# Altium PCB 6613360201.PcbDoc
Units mm, origin at the board's own origin, x right, y up, seen from the top; angles counter-clockwise.
Board outline 92.71 x 45 mm, 2 copper layers (Top Layer, Bottom Layer), stack 1.575 mm thick; 2 components, 4 nets, 16 pads, 4 vias.
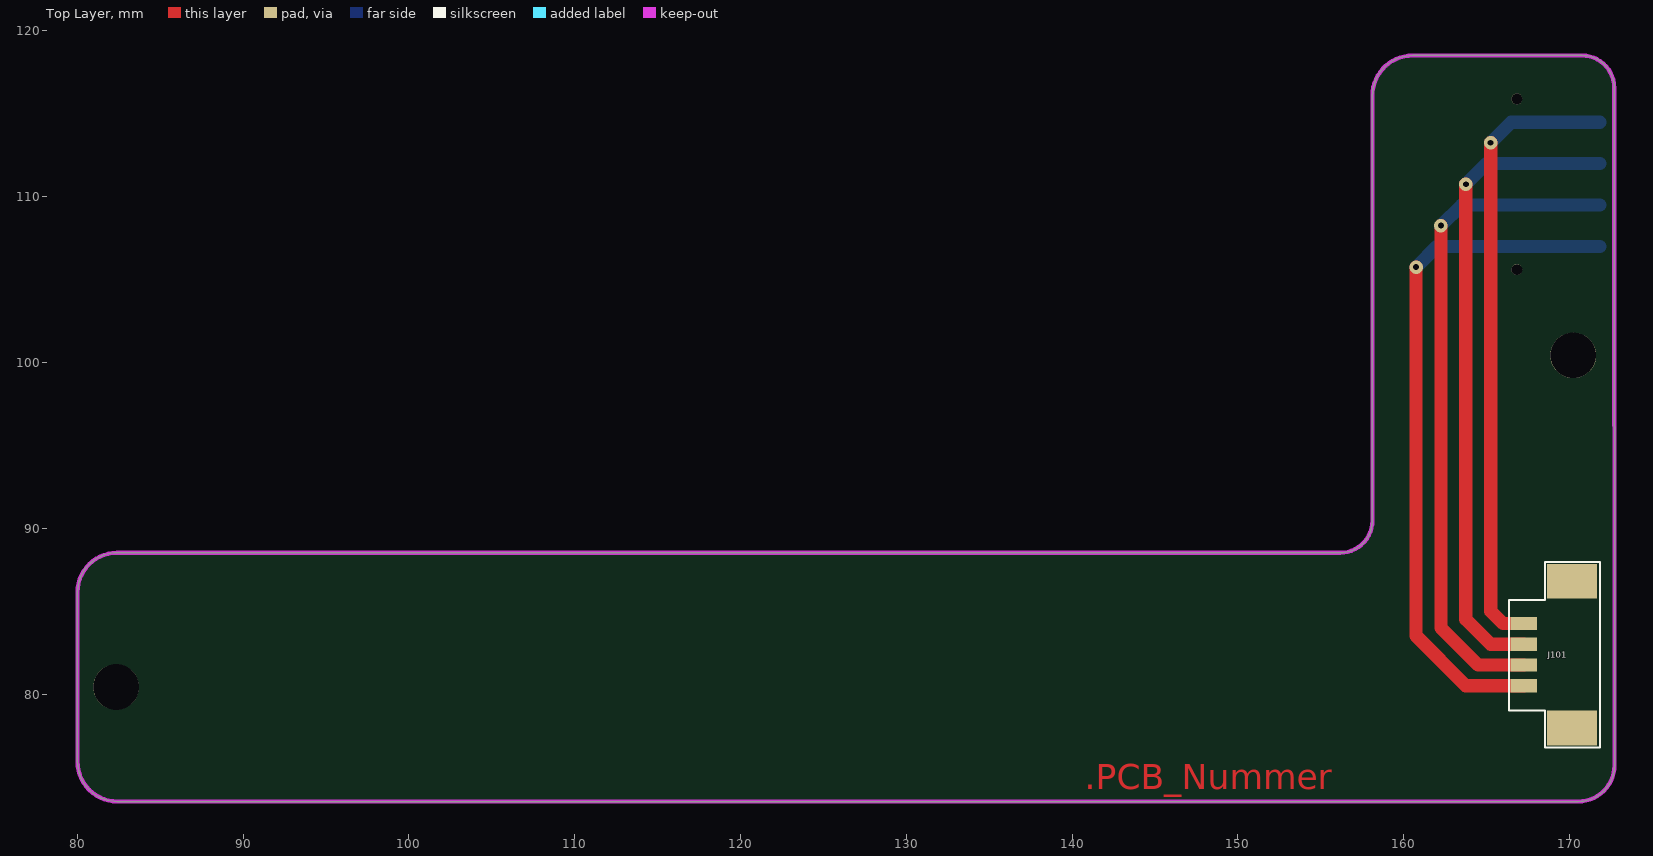
[diagram p0: Top Layer view]
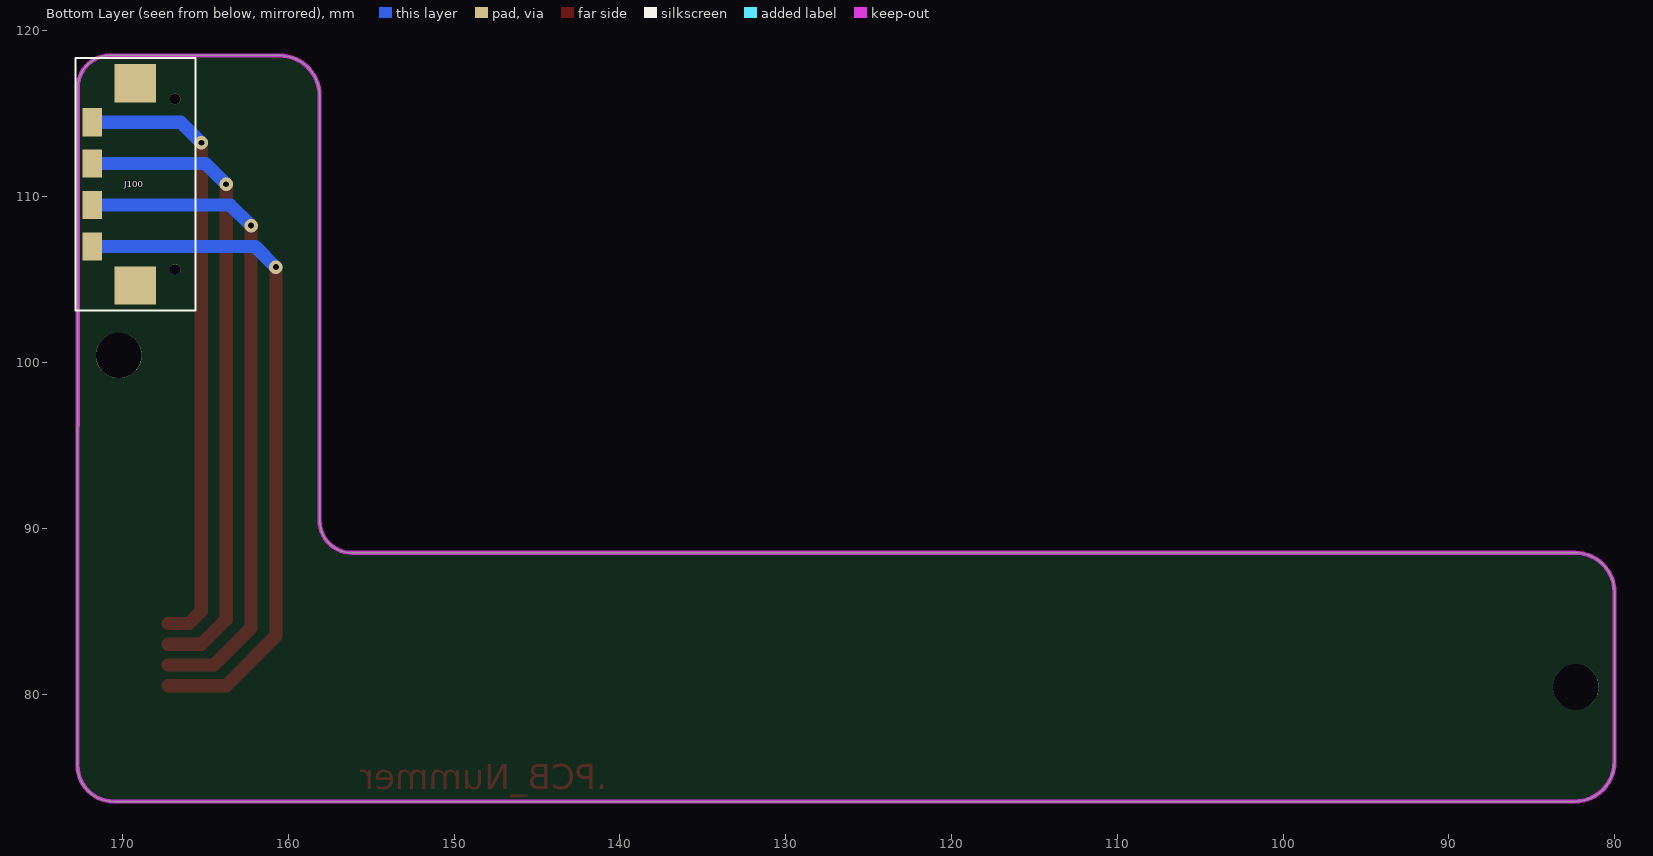
[diagram p1: Bottom Layer view, seen from below]

## Layer stack, top to bottom
Top Solder: solder mask 0.0127, Solder Resist, Dk 3.3
Top Layer: signal copper 0.035
Dielectric2: prepreg 1.5046, FR-4, Dk 4.3
Bottom Layer: signal copper 0.035
Bottom Solder: solder mask 0.0127, Solder Resist, Dk 3.3

## Board outline
80.01,75.927 80.01,86.138 cw(c82.391,86.138) 82.391,88.519 156.169,88.519 ccw(c156.169,90.465) 158.115,90.465 158.115,116.091 cw(c160.54,116.091) 160.54,118.516 170.759,118.516 cw(c170.759,116.573) 172.702,116.573 172.72,75.713 cw(c170.523,75.713) 170.523,73.516 82.421,73.516 cw(c82.421,75.927)

## Design rules (kind name [scope] priority, off if disabled: settings)
Clearance ClearancePad/Keepout [(IsPad) vs (OnLayer('Keep-Out Layer'))] p1: gap=0.5 ignorepadtopadclearanceinfootprint=FALSE except(0: Arc-Hole Track-Hole SMDPad-Hole THPad-Hole Via-Hole Fill-Hole Poly-Hole Region-Hole Text-Hole; 0.125: Arc-SMDPad Track-SMDPad)
Clearance ClearancePad/Pad [(IsPad) vs (IsPad)] p2: gap=0.203 ignorepadtopadclearanceinfootprint=FALSE except(0: Arc-Hole Track-Hole SMDPad-Hole THPad-Hole Via-Hole Fill-Hole Poly-Hole Region-Hole Text-Hole)
Clearance ClearancePoly/Keepout [(IsRegion) vs (OnLayer('Keep-Out Layer'))] p3: gap=0.508 ignorepadtopadclearanceinfootprint=FALSE except(0: Arc-Hole Track-Hole SMDPad-Hole THPad-Hole Via-Hole Fill-Hole Poly-Hole Region-Hole Text-Hole)
Clearance ClearancePoly/All [(IsRegion)] p4: gap=0.254 ignorepadtopadclearanceinfootprint=FALSE except(0: Arc-Hole Track-Hole SMDPad-Hole THPad-Hole Via-Hole Fill-Hole Poly-Hole Region-Hole Text-Hole)
Clearance "ClearancePad/Via same Net" [(IsPad) vs (IsVia)] p5: gap=0.127 ignorepadtopadclearanceinfootprint=FALSE except(0: Arc-Hole Track-Hole SMDPad-Hole THPad-Hole Via-Hole Fill-Hole Poly-Hole Region-Hole Text-Hole)
Clearance "ClearancePad/Via different Net" [(IsPad) vs (IsVia)] p6: gap=0.203 ignorepadtopadclearanceinfootprint=FALSE except(0: Arc-Hole Track-Hole SMDPad-Hole THPad-Hole Via-Hole Fill-Hole Poly-Hole Region-Hole Text-Hole)
Clearance ClearanceVia/Via [(IsVia) vs (IsVia)] p7: gap=0.203 ignorepadtopadclearanceinfootprint=FALSE except(0: Arc-Hole Track-Hole SMDPad-Hole THPad-Hole Via-Hole Fill-Hole Poly-Hole Region-Hole Text-Hole)
Clearance ClearanceTrack/Via [(IsTrack) vs (IsVia)] p8: gap=0.203 ignorepadtopadclearanceinfootprint=FALSE except(0: Arc-Hole Track-Hole SMDPad-Hole THPad-Hole Via-Hole Fill-Hole Poly-Hole Region-Hole Text-Hole)
Clearance ClearanceTrack/Pad [(IsTrack) vs (IsPad)] p9: gap=0.203 ignorepadtopadclearanceinfootprint=FALSE except(0: Arc-Hole Track-Hole SMDPad-Hole THPad-Hole Via-Hole Fill-Hole Poly-Hole Region-Hole Text-Hole)
Clearance ClearanceTrack/Track [(IsTrack) vs (IsTrack)] p10: gap=0.203 ignorepadtopadclearanceinfootprint=FALSE except(0: Arc-Hole Track-Hole SMDPad-Hole THPad-Hole Via-Hole Fill-Hole Poly-Hole Region-Hole Text-Hole)
ComponentClearance [All] p1: gap=0.127 collisioncheckmode=3 verticalgap=0.254 showdistances=FALSE
FabricationTestPointUsage TestPointUsage [All] p1: valid=0 allowmultiple=FALSE
FabricationTestpoint Testpoint [All] p1: side=3 testpointundercomponent=TRUE minsize=1.016 maxsize=2.54 preferedsize=1.524 minholesize=0 maxholesize=1.016 preferedholesize=0.813 testpointgrid=0.025 allowsidetop=TRUE allowsidebottom=TRUE usegrid=TRUE gridtolerance=0
HoleSize [All] p1: absolutevalues=TRUE maxlimit=254 minlimit=0.025 maxpercent=80.000 minpercent=20.000
PlaneConnect [All] p1: planeconnectstyle=Direct reliefexpansion=0.508 reliefentries=4 reliefconductorwidth=0.254 reliefairgap=0.254
PolygonConnect [All] p1: connectstyle=Direct reliefconductorwidth=0.254 reliefentries=4 polygonreliefangle="90 Angle" airgapwidth=0.254
RoomDefinition Connectors [InComponentClass('Connectors')] p1: confinementstyle=ConfineIn formatcopy=TRUE lockcomponents=FALSE outline 173.863,75.057 188.849,75.057 188.849,90.805 173.863,90.805
RoutingVias [All] p1: holewidth=0.356 width=0.813 viastyle="Through Hole" minholewidth=0.305 minwidth=0.61 maxholewidth=0.711 maxwidth=1.27
SilkToSolderMaskClearance SilkscreenOverComponentPads [IsPad] p1: minsilkscreentomaskgap=0.254 clearancetoexposedcopper=TRUE
SolderMaskExpansion [All] p1: expansion=0.102 istentingtop=FALSE
Width [All] p1: maxlimit=2.54 minlimit=0.203 preferedwidth=0.254
24 further rules are at their usual default settings.

## Components (designator, comment, footprint, x,y, rotation, side; value= is the part's Value field where it differs from the comment)
J100 "RRC-MC11-90-2" RRC-MC11-90-2 171.831,106.985 r90 bottom locked
J101 "MICRO-04 RIGHT-ANGLE" "MICRO-04 RIGHT" 167.25,80.47 r90 top

## Footprints (in the part's own frame and the unit in brackets; to place one, negate y for a bottom-side part, rotate by r counter-clockwise, add the part's x,y. Pads: shape width x height; smd on the part's side, far side on the other; paste and mask are expansions set on the pad)
"MICRO-04 RIGHT" [mm]
  rect 0.8x1.6 smd: 1(0.03,0) 2(1.28,0) 3(2.53,0) 4(3.78,0)
  rect 2.1x3 smd: 5(-2.52,-2.9) 6(6.33,-2.9)
  silkscreen extent -3.68,-4.6 7.49,0.89, body extent -3.17,-5.04 6.98,0.16, height 3.38
RRC-MC11-90-2 [mm]
  rect 1.7x1.2 smd: 1(0.009,0) 2(2.509,0) 3(5.009,0) 4(7.509,0)
  rect 2.3x2.5 smd: 5(-2.341,-2.6) 6(9.859,-2.6)
  round 0.65 hole 0.65 unplated: ""(-1.391,-5) ""(8.909,-5)
  silkscreen extent -3.86,-6.22 11.38,1.02, body extent -2.44,-5.89 10.06,-0.14, height 4

## Part data
J100: library part N0182, "Connector", Manufacturer="RRC Power Solutions", Operating Range="-40°C to +105°C", Package=None, Supplier Part Number 1=328-RRC-MC11-90-2, Availability="In Stock", Availability Date="02.06.2023 DUJ", Changed="02.06.2023 DUJ", Check_prices=https://www.snapeda.com/parts/RRC-MC11-90-2/RRC/view-part/?ref=eda, Component Type=Standard, ComponentLink1Description=Datasheet, ComponentLink1URL=https://www.rrc-ps.com/fileadmin/Dokumente/Data-Sheets/DS_RRC-MC11-90-2.pdf, Flammability="UL 94 V-0", ID=N0182, Manufacturer Part Number=RRC-MC11-90-2, MF="RRC Power Solutions", MP=RRC-MC11-90-2, Note="RRC Battery Contacts", Part Status=Active, Part-Number=00.0000.0000, Pin Count=4, Price=3.18, Price 100=2.89, Price 1000=2.89, Price Date="02.06.2023 DUJ", RoHS="RoHS Compliant", RoHS compliant=Yes, SnapEDA_Link=https://www.snapeda.com/parts/RRC-MC11-90-2/RRC/view-part/?ref=snap, Specification="02.06.2023 DUJ", Status=Active, Supplier=Mouser
J101: library part N0183, "Connector", Manufacturer=Molex, Manufacturer Part Number=53261-0471, Operating Range="-40°C to +105°C", Supplier Part Number 1=538-53261-0471, Availability Date="02.06.2023 DUJ", Changed="02.06.2023 DUJ", Component Type=Standard, ComponentLink2Description=Drawing, ComponentLink2URL=https://www.molex.com/content/dam/molex/molex-dot-com/products/automated/en-us/salesdrawingpdf/532/53261/532610471_sd.pdf?inline, Flammability="UL 94 V-0", ID=N0183, Note="Headers & Wire Housings 1.25MM HDR 4 CKT Right-Angle", Part Status=Active, Part-Number=00.0000.0000, Pin Count=4, Price=0.726, Price 100=0.502, Price 1000=0.357, Price Date="02.06.2023 DUJ", RoHS="RoHS Compliant", RoHS compliant=Yes, Specification="02.06.2023 DUJ", Status=Active, Supplier=Mouser

## Free pads (board coordinates)
  round 2.75 hole 2.75: 1(82.343,80.424) 1(170.232,100.427)

## Via types
v1: diameter 0.813, hole 0.356, Top Layer to Bottom Layer, tented both sides, 4 vias

## Nets (pads, with @x,y where several pads share a name; then routed paths per layer and width w, separated by ;. In a path a pad name is that pad's centre, name@x,y a point inside that pad or via, vN(x,y) a via of type N, cw(c..) or ccw(c..) an arc to the next point about the centre after c; other vN are vias at no path point)
SCL: J100.1 J101.1 | length 41.6
  Top Layer w0.8: v1(160.75,105.75) 160.75,83.5 163.75,80.5 J101.1
  Bottom Layer w0.8: v1(160.75,105.75) 161.994,106.994 J100.1
SDA: J100.3 J101.3 | length 39
  Top Layer w0.8: v1(163.75,110.75) 163.75,84.5 165.25,83 J101.3
  Bottom Layer w0.8: v1(163.75,110.75) 164.994,111.994 J100.3
V+: J100.2 J101.2 | length 40.3
  Top Layer w0.8: v1(162.25,108.25) 162.25,84 164.5,81.75 J101.2
  Bottom Layer w0.8: v1(162.25,108.25) 163.494,109.494 J100.2
V-: J100.4 J101.4 | length 37.7
  Top Layer w0.8: v1(165.25,113.25) 165.25,85 166,84.25 J101.4
  Bottom Layer w0.8: v1(165.25,113.25) 166.494,114.494 J100.4
pads on no net: J100. J100.5 J100.6 J101.5 J101.6

## Keep-outs
Keep-Out Layer:
  the board outline again, w0.254

## Other copper
Top Layer:
  text ".PCB_Nummer" at 140.754,74.254 h1.52

## Silkscreen, mask and mechanical layers (free items; w line width, h text height)
Top Overlay:
  lines w0.1: 213,177 281,177 ; 213,172 281,172 281,182 213,182 213,172
  text "VARIANT:" at 215,179 h1.52
  text ".VariantName" at 228,179 h1.52
  text "DESCRIPTION:" at 215,174 h1.52
  text ".VariantDescription" at 233,174 h1.52
Bottom Overlay:
  lines w0.1: 213,177 281,177 ; 213,172 213,182 281,182 281,172 213,172
  text ".VariantName" at 266,179 h1.52
  text "VARIANT:" at 279,179 h1.52
  text ".VariantDescription" at 261,174 h1.52
  text "DESCRIPTION:" at 279,174 h1.52
Mechanical 16:
  lines w0.127: -5.08,43.18 0,43.18 ; -5.08,91.44 0,91.44 ; -5.08,139.7 0,139.7 ; 67.945,-5.08 67.945,0 ; 67.945,182.88 67.945,187.96 ; 132.08,0 167.64,0 ; 140.97,-5.08 140.97,0 ; 140.97,182.88 140.97,187.96 ; 167.64,11.303 281.94,11.303 ; 167.64,21.336 281.94,21.336 ; 167.64,26.162 281.94,26.162 ; 213.995,-5.08 213.995,0 ; 213.995,182.88 213.995,187.96 ; 218.948,0 218.948,11.303 ; 226.695,-10.16 231.013,-10.16 ; 252.476,26.162 252.476,30.48 ; 267.462,21.336 267.462,26.162 ; 281.94,43.18 287.02,43.18 ; 281.94,91.44 287.02,91.44 ; 281.94,139.7 287.02,139.7 ; 167.64,0 281.94,0 ; 167.64,0 167.64,30.48 205.74,30.48 281.94,30.48 281.94,0 ; 281.94,0 0,0 0,182.88 281.94,182.88 281.94,0 ; -5.08,-5.08 287.02,-5.08 287.02,187.96 -5.08,187.96 -5.08,-5.08
  text "1" at 31.166,184.531 h1.78
  text "2" at 103.81,184.531 h1.78
  text "3" at 176.962,184.531 h1.78
  text "4" at 249.86,184.531 h1.78
  text "A" at -3.175,161.519 h1.78
  text "A" at 283.845,161.519 h1.78
  text "B" at -3.175,113.462 h1.78
  text "B" at 283.845,113.462 h1.78
  text "C" at -3.175,64.948 h1.78
  text "C" at 283.845,64.948 h1.78
  text "Rotronic AG" at 172.212,27.559 h1.52
  text "Grindelstrasse 6" at 193.04,27.559 h1.52
  text "CH-8303 Bassersdorf" at 222.377,27.432 h1.52
  text "+41 (0)44 838 11 11" at 254.508,27.432 h1.52
  text "Revision" at 268.097,23.241 h1.02
  text ".Revision_V" at 276.418,23.226 h1.02
  text "Sheet" at 171.958,22.86 h1.52
  text ".Printout_Name" at 181.483,22.86 h1.52
  text "elektronisch signiert" at 269.494,21.971 h0.51
  text "D" at -3.175,16.942 h1.78
  text "D" at 283.845,16.942 h1.78
  text ".Project_Name" at 172.085,15.113 h2.54
  text "Print" at 219.964,7.112 h1.52
  text ".PCB_Nummer" at 241.808,7.112 h1.52
  text "Designer" at 168.656,6.604 h1.52
  text ".PCB_Designer" at 190.5,6.477 h1.52
  text "CAD" at 219.964,2.54 h1.52
  text ".Altium_Version" at 241.808,2.54 h1.52
  text "Datum" at 168.656,2.413 h1.52
  text ".Print_Date" at 190.5,2.413 h1.52
  text "1" at 31.166,-3.429 h1.78
  text "2" at 103.81,-3.429 h1.78
  text "3" at 176.962,-3.429 h1.78
  text "4" at 249.86,-3.429 h1.78
Drill Drawing:
  text "DRILLTAB:" at 1,2 h1.52
  text ".Legend" at 16,2 h1.52
PCB Manufacturing Information:
  lines w0.1: 213,122 281,122 ; 213,127 281,127 ; 213,132 281,132 ; 213,137 281,137 ; 213,142 281,142 ; 213,147 281,147 ; 213,152 281,152 ; 213,157 281,157 ; 213,162 281,162 ; 213,167 281,167 ; 213,172 281,172 ; 213,177 281,177 ; 247,117 247,177 ; 213,117 281,117 281,182 213,182 213,117
  text "PCB Manufacturing Information" at 215,179 h1.52
  text "PCB Data" at 215,174 h1.52
  text ".PCB_Data" at 249,174 h1.52
  text "PCB Thickness" at 215,169 h1.52
  text ".PCB_Thickness" at 249,169 h1.52
  text "PCB Material" at 215,164 h1.52
  text ".PCB_Material" at 249,164 h1.52
  text "PCB Layer Count" at 215,159 h1.52
  text ".PCB_Layer_Count" at 249,159 h1.52
  text "PCB Copper Thickness" at 215,154 h1.52
  text ".PCB_Copper_Thickness" at 249,154 h1.52
  text "PCB Solder Surface" at 215,149 h1.52
  text ".PCB_Solder_Surface" at 249,149 h1.52
  text "PCB Surface" at 215,144 h1.52
  text ".PCB_Surface" at 249,144 h1.52
  text "PCB Silkscreen" at 215,139 h1.52
  text ".PCB_Silkscreen" at 249,139 h1.52
  text "Stencil thickness" at 215,134 h1.52
  text ".Stencil_Thickness" at 249,134 h1.52
  text "Via Count" at 215,129 h1.52
  text ".Via_Count" at 249,129 h1.52
  text "Pad Count" at 215,124 h1.52
  text ".Pad_Count" at 249,124 h1.52
  text "PCB Controll" at 215,119 h1.52
  text ".PCB_Controll" at 249,119 h1.52